# Altium PCB seven_segment_driver_pcb.PcbDoc
Units mm, origin at the board's own origin, x right, y up, seen from the top; angles counter-clockwise.
Board outline 151.89 x 101.22 mm, 2 copper layers (Top Layer, Bottom Layer); 93 components, 104 nets, 288 pads, 8 vias.
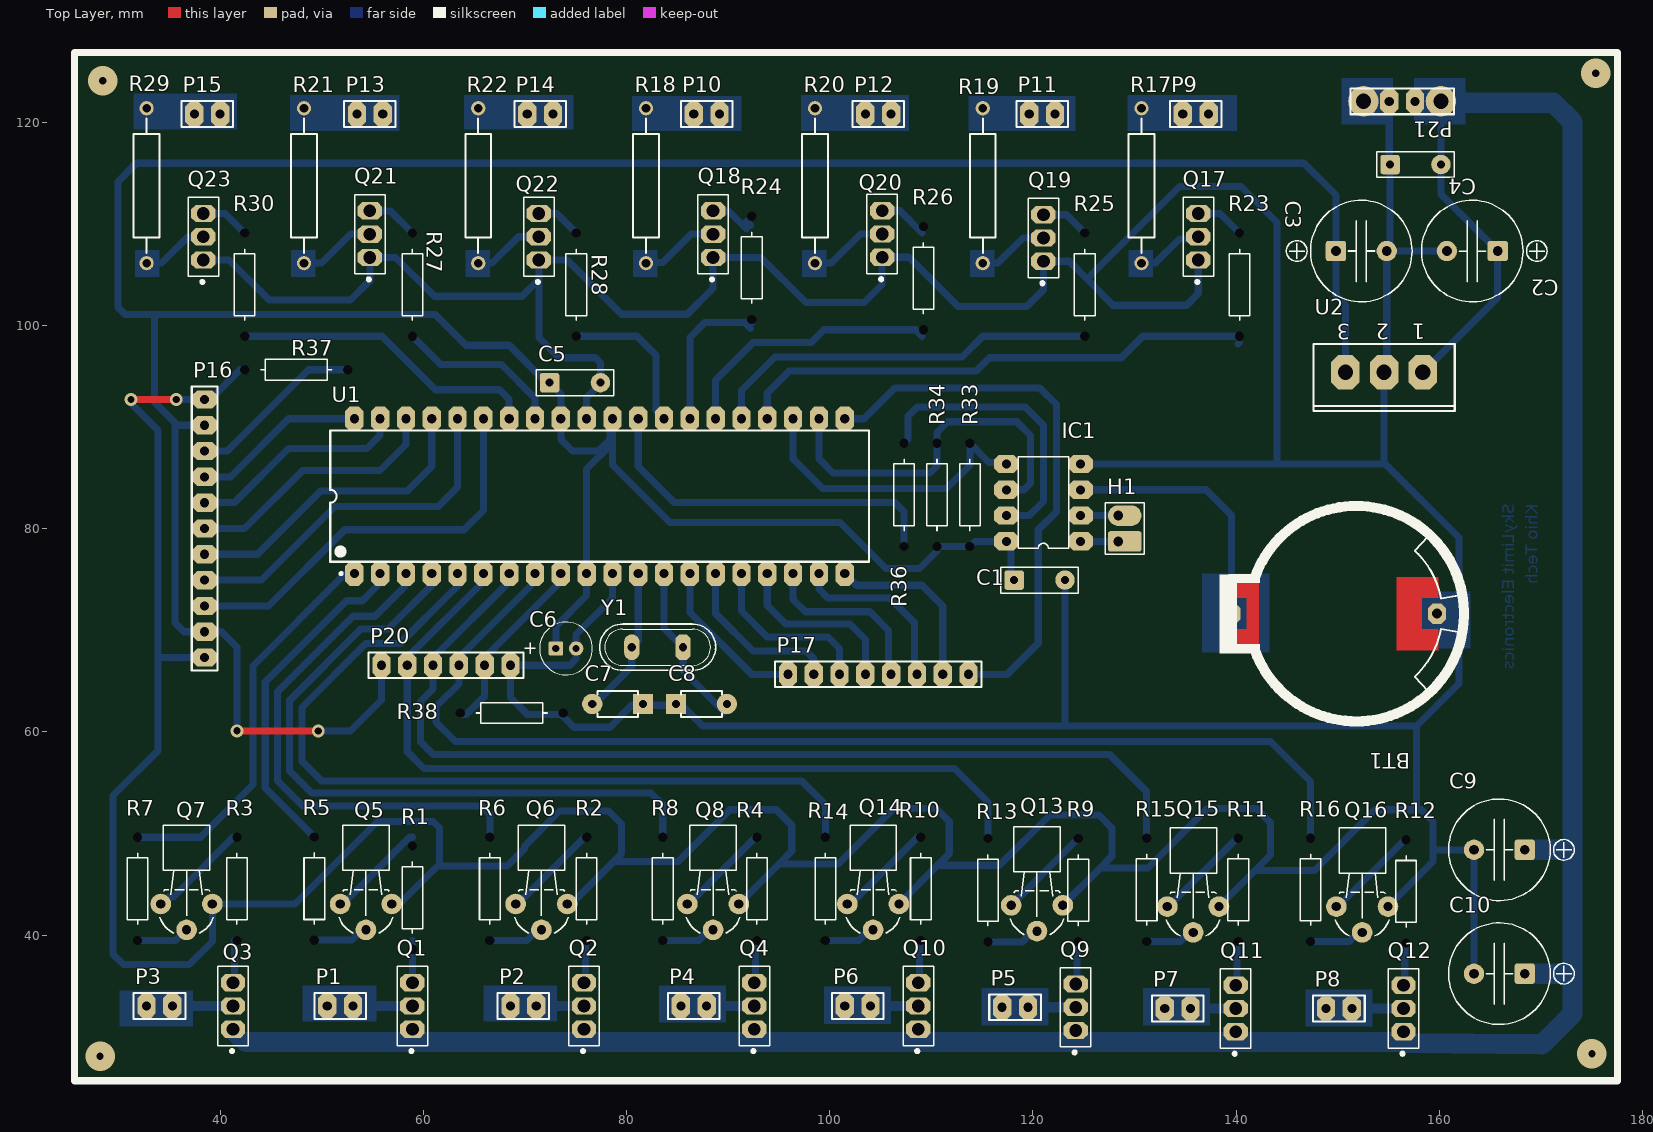
[diagram p0: Top Layer view]
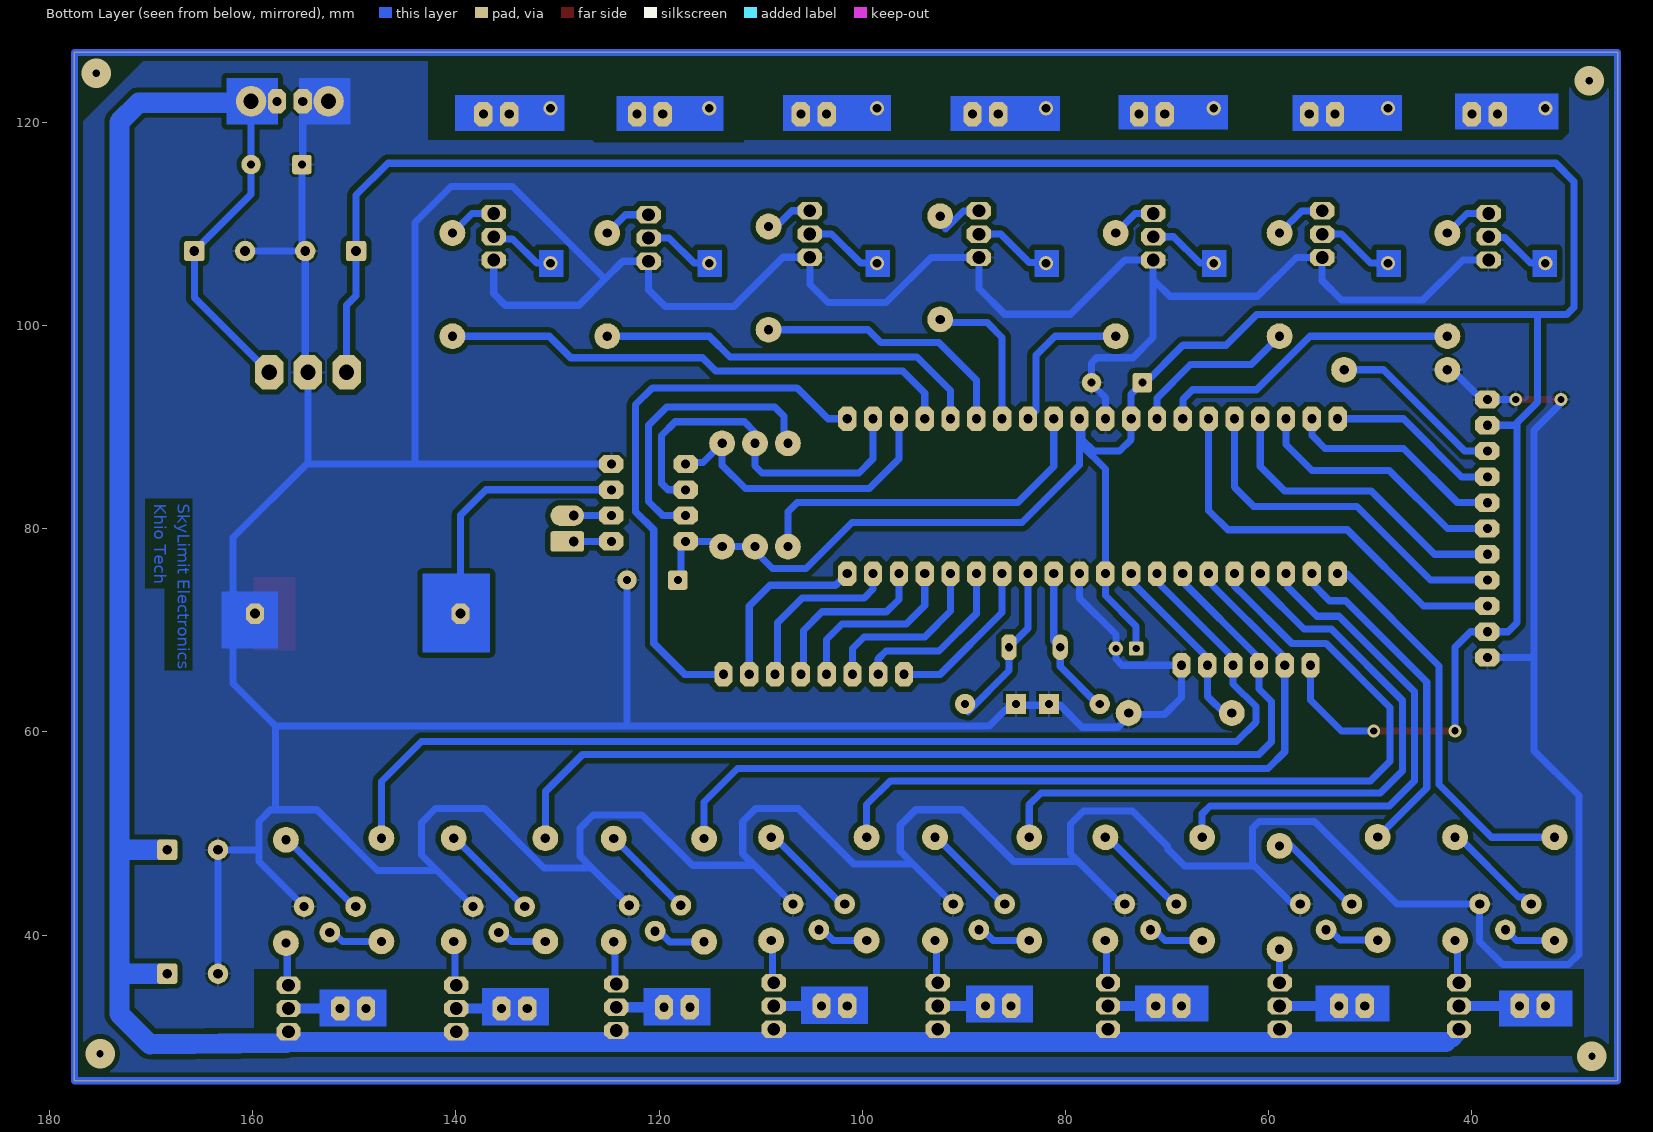
[diagram p1: Bottom Layer view, seen from below]
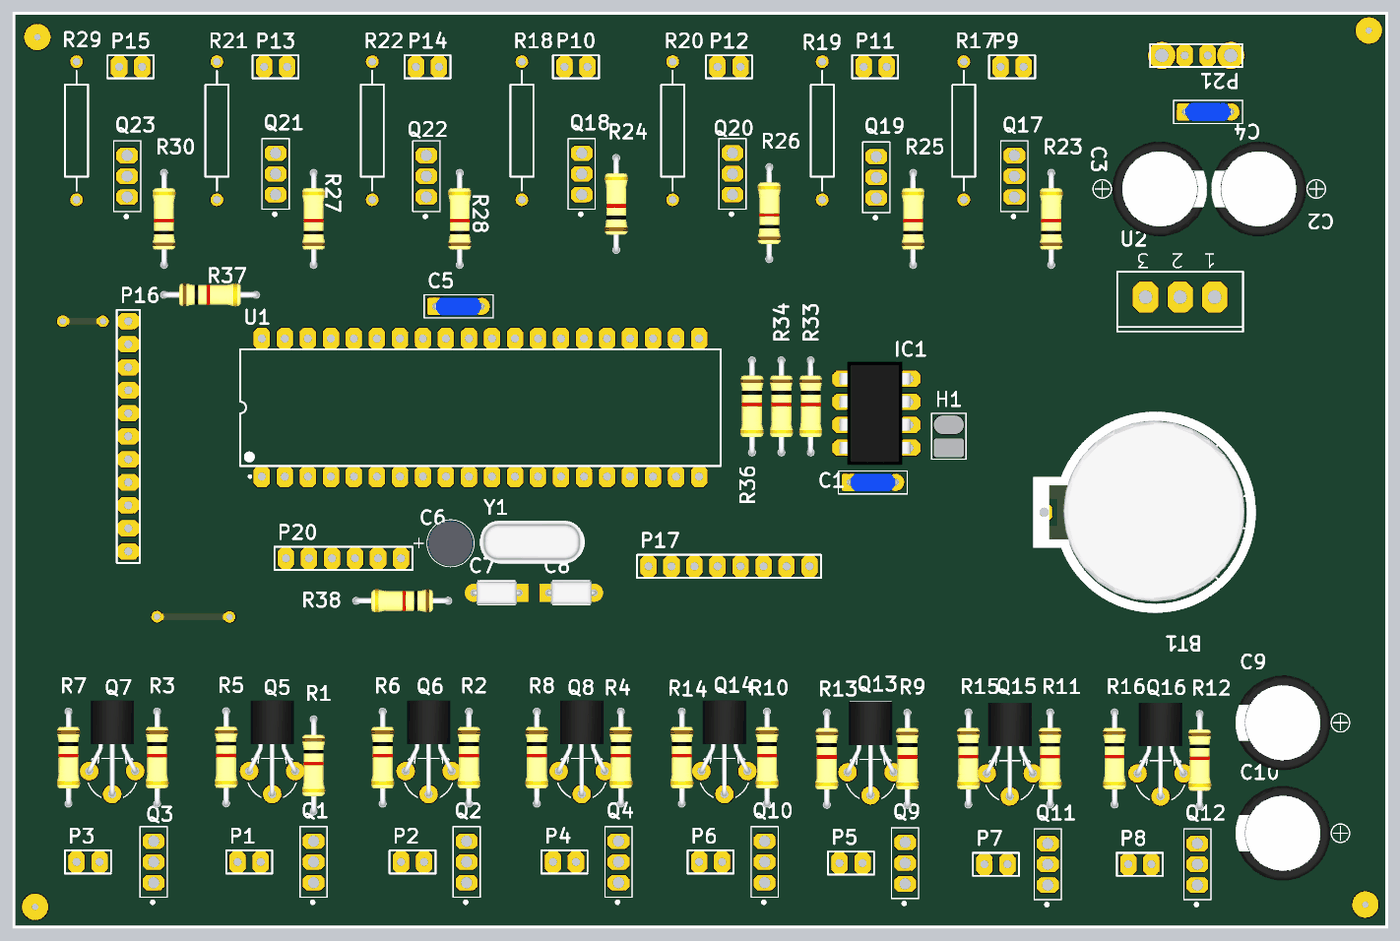
[diagram p2: 3D render of the assembled board from above, using the file's embedded part models]

## Layer stack, top to bottom
Top Solder: solder mask 0.0102, Solder Resist, Dk 3.5
Top Layer: signal copper 0.0356
Dielectric 1: dielectric 0.32, FR-4, Dk 4.8
Bottom Layer: signal copper 0.0356
Bottom Solder: solder mask 0.0102, Solder Resist, Dk 3.5

## Board outline
25.654,25.654 177.546,25.654 177.546,126.873 25.654,126.873

## Design rules (kind name [scope] priority, off if disabled: settings)
Clearance [All] p1: gap=0.5 ignorepadtopadclearanceinfootprint=FALSE except(0.8: Poly-Poly)
PolygonConnect [All] p1: connectstyle=Relief reliefconductorwidth=0.254 reliefentries=4 polygonreliefangle="90 Angle" airgapwidth=0.254
RoutingVias [All] p1: holewidth=0.711 width=1.27 viastyle="Through Hole" minholewidth=0.711 minwidth=1.27 maxholewidth=0.711 maxwidth=1.27
SolderMaskExpansion [All] p1: expansion=0.102
Width [All] p1: maxlimit=2 minlimit=0.7 preferedwidth=0.7
30 further rules are at their usual default settings.

## Classes and differential pairs
component class seven_segment_driver_sche: BT1 C1 C2 C3 C4 C5 C6 C7 C8 C9 C10 H1 IC1 P16 P17 P20 P21 Q24 Q25 R33 R34 R36 R37 R38 U1 U2 Y1
component class seven_segment_driver_sche2: P1 P2 P3 P4 P5 P6 P7 P8 P9 P10 P11 P12 P13 P14 P15 Q1 Q2 Q3 Q4 Q5 Q6 Q7 Q8 Q9 Q10 Q11 Q12 Q13 Q14 Q15 Q16 Q17 Q18 Q19 Q20 Q21 Q22 Q23 R1 R2 R3 R4 R5 R6 R7 R8 R9 R10 R11 R12 R13 R14 R15 R16 R17 R18 R19 R20 R21 R22 R23 R24 R25 R26 R27 R28 R29 R30

## Components (designator, comment, footprint, x,y, rotation, side; value= is the part's Value field where it differs from the comment)
BT1 "CR2032" "CR2032 CELL HOLDER" 151.816,71.628 r180 top
C1 "approved sub OK" CAPC500P450250X550 120.65,74.93 r0 top value=220n
C2 "470µ" CAPE10.0MM_Rad_10x14mm 163.235,107.315 r180 top
C3 "470µ" CAPE10.0MM_Rad_10x14mm 152.313,107.315 r0 top
C4 "approved sub OK" CAPC500P450250X550 157.647,115.824 r0 top value=220n
C5 "approved sub OK" CAPC500P450250X550 74.93,94.361 r0 top value=220n
C6 "approved sub OK" CAPE_5x11x2LS 74.041,68.199 r0 top value=10uF
C7 "K220J15C0GF5TH5" Vishay_K220J15_0 79.121,62.738 r180 top
C8 "K220J15C0GF5TH5" Vishay_K220J15_0 87.376,62.738 r0 top
C9 "470µ" CAPE10.0MM_Rad_10x14mm 165.902,48.387 r180 top
C10 "470µ" CAPE10.0MM_Rad_10x14mm 165.902,36.195 r180 top
H1 "Header" HDR_1x2_Offset 128.397,80.01 r180 top
IC1 "DS1307" DIP8-300 121.031,82.55 r180 top
P1 "Header 2" HDR1X2 50.546,33.024 r0 top
P2 "Header 2" HDR1X2 71.12,33.024 r180 top
P3 "Header 2" HDR1X2 35.306,33.024 r180 top
P4 "Header 2" HDR1X2 87.884,33.024 r180 top
P5 "Header 2" HDR1X2 119.507,32.897 r180 top
P6 "Header 2" HDR1X2 104.013,33.024 r180 top
P7 "Header 2" HDR1X2 135.509,32.77 r180 top
P8 "Header 2" HDR1X2 151.384,32.77 r180 top
P9 "Header 2" HDR1X2 137.287,120.796 r180 top
P10 "Header 2" HDR1X2 89.154,120.796 r180 top
P11 "Header 2" HDR1X2 122.174,120.796 r180 top
P12 "Header 2" HDR1X2 106.045,120.796 r180 top
P13 "Header 2" HDR1X2 53.467,120.796 r0 top
P14 "Header 2" HDR1X2 72.771,120.796 r180 top
P15 "Header 2" HDR1X2 40.005,120.796 r180 top
P16 "Header 11" HDR1X11 38.481,92.71 r270 top
P17 "Header 8" HDR1X8 95.885,65.659 r0 top
P20 "Header 6" HDR1X6 68.58,66.548 r180 top
P21 "Header 4" HDR1X4 152.527,122.047 r0 top
Q1 "BD136" *TO229P780X300X2000-3 58.928,30.734 r90 top
Q2 "BD136" *TO229P780X300X2000-3 75.819,30.734 r90 top
Q3 "BD136" *TO229P780X300X2000-3 41.275,30.734 r90 top
Q4 "BD136" *TO229P780X300X2000-3 92.583,30.734 r90 top
Q5 "2N3904" TO-92_Flat 54.356,43.053 r270 top
Q6 "2N3904" TO-92_Flat 71.628,43.053 r270 top
Q7 "2N3904" TO-92_Flat 36.703,43.053 r270 top
Q8 "2N3904" TO-92_Flat 88.519,43.053 r270 top
Q9 "BD136" *TO229P780X300X2000-3 124.206,30.607 r90 top
Q10 "BD136" *TO229P780X300X2000-3 108.712,30.734 r90 top
Q11 "BD136" *TO229P780X300X2000-3 139.954,30.48 r90 top
Q12 "BD136" *TO229P780X300X2000-3 156.464,30.48 r90 top
Q13 "2N3904" TO-92_Flat 120.396,42.926 r270 top
Q14 "2N3904" TO-92_Flat 104.267,43.053 r270 top
Q15 "2N3904" TO-92_Flat 135.763,42.799 r270 top
Q16 "2N3904" TO-92_Flat 152.4,42.799 r270 top
Q17 "BD135" *TO229P780X300X2000-3 136.271,106.433 r90 top
Q18 "BD135" *TO229P780X300X2000-3 88.519,106.687 r90 top
Q19 "BD135" *TO229P780X300X2000-3 121.031,106.306 r90 top
Q20 "BD135" *TO229P780X300X2000-3 105.156,106.699 r90 top
Q21 "BD135" *TO229P780X300X2000-3 54.737,106.687 r90 top
Q22 "BD135" *TO229P780X300X2000-3 71.374,106.433 r90 top
Q23 "BD135" *TO229P780X300X2000-3 38.354,106.433 r90 top
R1 "Carbon Film" RESTH_AXIAL-0.4 58.928,43.688 r270 top value=1K
R2 "Carbon Film" RESTH_AXIAL-0.4 76.073,44.54 r270 top value=1K
R3 "Carbon Film" RESTH_AXIAL-0.4 41.656,44.54 r270 top value=1K
R4 "Carbon Film" RESTH_AXIAL-0.4 92.837,44.54 r270 top value=1K
R5 "Carbon Film" RESTH_AXIAL-0.4 49.276,44.577 r270 top value=1K
R6 "Carbon Film" RESTH_AXIAL-0.4 66.548,44.54 r270 top value=1K
R7 "Carbon Film" RESTH_AXIAL-0.4 31.877,44.54 r270 top value=1K
R8 "Carbon Film" RESTH_AXIAL-0.4 83.566,44.54 r270 top value=1K
R9 "Carbon Film" RESTH_AXIAL-0.4 124.46,44.413 r270 top value=1K
R10 "Carbon Film" RESTH_AXIAL-0.4 108.966,44.54 r270 top value=1K
R11 "Carbon Film" RESTH_AXIAL-0.4 140.208,44.45 r270 top value=1K
R12 "Carbon Film" RESTH_AXIAL-0.4 156.718,44.286 r270 top value=1K
R13 "Carbon Film" RESTH_AXIAL-0.4 115.57,44.413 r270 top value=1K
R14 "Carbon Film" RESTH_AXIAL-0.4 99.568,44.54 r270 top value=1K
R15 "Carbon Film" RESTH_AXIAL-0.4 131.191,44.45 r270 top value=1K
R16 "Carbon Film" RESTH_AXIAL-0.4 147.32,44.45 r270 top value=1K
R17 "Metal Film" AXIAL-0.6 130.683,113.744 r270 top value=10R
R18 "Metal Film" AXIAL-0.6 81.915,113.744 r270 top value=10R
R19 "Metal Film" AXIAL-0.6 115.062,113.744 r270 top value=10R
R20 "Metal Film" AXIAL-0.6 98.552,113.744 r270 top value=10R
R21 "Metal Film" AXIAL-0.6 48.26,113.744 r270 top value=10R
R22 "Metal Film" AXIAL-0.6 65.405,113.744 r270 top value=10R
R23 "Carbon Film" RESTH_AXIAL-0.4 140.335,104.013 r90 top value=1K
R24 "Carbon Film" RESTH_AXIAL-0.4 92.329,105.664 r90 top value=1K
R25 "Carbon Film" RESTH_AXIAL-0.4 125.095,104.013 r90 top value=1K
R26 "Carbon Film" RESTH_AXIAL-0.4 109.22,104.648 r90 top value=1K
R27 "Carbon Film" RESTH_AXIAL-0.4 58.928,104.013 r90 top value=1K
R28 "Carbon Film" RESTH_AXIAL-0.4 75.057,104.013 r90 top value=1K
R29 "Metal Film" AXIAL-0.6 32.766,113.744 r270 top value=10R
R30 "Carbon Film" RESTH_AXIAL-0.4 42.418,104.013 r90 top value=1K
R33 "Carbon Film" RESTH_AXIAL-0.4 113.792,83.312 r270 top value=4.7K
R34 "Carbon Film" RESTH_AXIAL-0.4 110.553,83.312 r270 top value=4.7K
R36 "Carbon Film" RESTH_AXIAL-0.4 107.315,83.312 r270 top value=330
R37 "Carbon Film" RESTH_AXIAL-0.4 47.498,95.631 r0 top value=2.2K
R38 "Carbon Film" RESTH_AXIAL-0.4 68.707,61.849 r180 top value=10K
U1 "ATmega32-16PU" 40P6 77.343,83.185 r90 top
U2 "LM7805" To-254-AA 154.559,95.377 r180 top
Y1 "4MHz" "Cristal mini" 83.058,68.326 r180 top

## Footprints (in the part's own frame and the unit in brackets; to place one, negate y for a bottom-side part, rotate by r counter-clockwise, add the part's x,y. Pads: shape width x height; smd on the part's side, far side on the other; paste and mask are expansions set on the pad)
40P6 [mm] "40-Pin Ceramic Dual In-Line Package (CerDIP)"
  oct 2.4x1.8 hole 0.9: 1(-7.62,24.13) 2(-7.62,21.59) 3(-7.62,19.05) 4(-7.62,16.51) 5(-7.62,13.97) 6(-7.62,11.43) 7(-7.62,8.89) 8(-7.62,6.35) 9(-7.62,3.81) 10(-7.62,1.27) 11(-7.62,-1.27) 12(-7.62,-3.81) 13(-7.62,-6.35) 14(-7.62,-8.89) 15(-7.62,-11.43) 16(-7.62,-13.97) 17(-7.62,-16.51) 18(-7.62,-19.05) 19(-7.62,-21.59) 20(-7.62,-24.13) 21(7.62,-24.13) 22(7.62,-21.59) 23(7.62,-19.05) 24(7.62,-16.51) 25(7.62,-13.97) 26(7.62,-11.43) 27(7.62,-8.89) 28(7.62,-6.35) 29(7.62,-3.81) 30(7.62,-1.27) 31(7.62,1.27) 32(7.62,3.81) 33(7.62,6.35) 34(7.62,8.89) 35(7.62,11.43) 36(7.62,13.97) 37(7.62,16.51) 38(7.62,19.05) 39(7.62,21.59) 40(7.62,24.13)
  silkscreen extent -7.74,-26.5 6.45,26.5, body extent -7.05,-26.47 7.05,26.47, height 4.83
*TO229P780X300X2000-3 [mm]
  oct 1.7x2.4 hole 1.25: 1(0,0) 2(2.29,0) 3(4.58,0)
  silkscreen extent -2.31,-1.5 6.19,1.5
AXIAL-0.6 [mm] "Axial Device, Thru-Hole; 2 Leads; 0.6 in Pin Spacing"
  round 1.4 hole 0.85: 1(-7.62,0) 2(7.62,0)
  silkscreen extent -6.6,-1.27 6.6,1.27
CAPC500P450250X550 [mm] "TDK FK24 radial ceramic capacitor"
  round 0.508 on Mech15: 0(0,0)
  rrect25% 1.905x1.905 hole 0.8: 1(-2.5,0)
  round 1.905 hole 0.8: 2(2.5,0)
  silkscreen extent -3.81,-1.27 3.81,1.27, body extent -2.8,-1 2.8,1, height 5.47
CAPE10.0MM_Rad_10x14mm [mm] "10mm Pitch Radial Capacitor 10x14mm DxH"
  round 0.5 on Mech15: 0(0,0)
  rrect25% 2x2 hole 0.965: 1(-2.5,0)
  round 2 hole 0.965: 2(2.5,0)
  silkscreen extent -7.37,-5 5,5, body extent -5.25,-5.24 5.21,5.24, height 13.99
CAPE_5x11x2LS [mil] "Capacitor, electrolytic, radial can"
  round 39.37 on Mech15: 0(0,0)
  rrect25% 56x56 hole 28: 1(-39.37,0)
  round 56 hole 28: 2(39.37,0)
  silkscreen extent -159,-102 102,102, body extent -98,-98 98,98, height 433
"CR2032 CELL HOLDER" [mm]
  oct 1.8x2 hole 1: 1(12.275,0) 2(-7.95,0)
  Top Layer region: 10.802,3.591 9.577,3.591 9.577,-3.61 10.802,-3.61
  Top Layer region: 9.577,-1.534 9.577,-3.609 12.302,-3.609 12.302,-1.534
  Top Layer region: 12.298,1.534 12.298,3.609 9.573,3.609 9.573,1.534
  Top Layer region: -8.109,-1.527 -8.109,-3.602 -3.959,-3.602 -3.959,-1.527
  Top Layer region: -3.94,1.527 -3.94,3.602 -8.09,3.602 -8.09,1.527
  Top Layer region: -6.475,-3.6 -3.95,-3.6 -3.95,3.6 -6.475,3.6
  silkscreen extent -10.6,-10.6 13.47,10.6, body extent -10.62,-10.59 13.17,10.63, height 10
"Cristal mini" [mm] "Cristal de cuarzo empaque pequeño"
  oct 1.524x2.54 hole 0.8: 1(-2.5,0)
  oval 1.524x2.54 hole 0.8: 2(2.54,0)
  silkscreen extent -5.71,-2.29 5.71,2.29, body extent -5.63,-2.35 5.72,2.3, height 3.5
DIP8-300 [mm] "DIP, 8-Leads, 0.300\" lead span , 0.100\" lead pitch, IPC Density A"
  round 1 on Mech15: 0(0,0)
  oct 2.4x1.8 hole 0.889: 1(-3.658,3.81) 2(-3.658,1.27) 3(-3.658,-1.27) 4(-3.658,-3.81) 5(3.658,-3.81) 6(3.658,-1.27) 7(3.658,1.27) 8(3.658,3.81)
  silkscreen extent -2.5,-4.5 2.5,4.5, body extent -3.78,-5.71 4.09,5.72, height 4.19
HDR1X2 [mm] "Connector; Header; 2 Position"
  oct 1.8x2.4 hole 0.9: 1(0,0) 2(2.54,0)
  silkscreen extent -1.27,-1.27 3.81,1.27
HDR1X4 [mm] "Connector; Header; 4 Position"
  round 3 hole 1.5: 1(0,0) 4(7.62,0)
  oct 1.8x2.4 hole 0.9: 2(2.54,0) 3(5.08,0)
  silkscreen extent -1.27,-1.27 8.89,1.27
HDR1X6 [mm] "Connector; Header; 6 Position"
  oct 1.8x2.4 hole 0.9: 1(0,0) 2(2.54,0) 3(5.08,0) 4(7.62,0) 5(10.16,0) 6(12.7,0)
  silkscreen extent -1.27,-1.27 13.97,1.27
HDR1X8 [mm] "Connector; Header; 8 Position"
  oct 1.8x2.4 hole 0.9: 1(0,0) 2(2.54,0) 3(5.08,0) 4(7.62,0) 5(10.16,0) 6(12.7,0) 7(15.24,0) 8(17.78,0)
  silkscreen extent -1.27,-1.27 19.05,1.27
HDR1X11 [mm] "Connector; Header; 11 Position"
  oct 1.8x2.4 hole 0.9: 1(0,0) 2(2.54,0) 3(5.08,0) 4(7.62,0) 5(10.16,0) 6(12.7,0) 7(15.24,0) 8(17.78,0) 9(20.32,0) 10(22.86,0) 11(25.4,0)
  silkscreen extent -1.27,-1.27 26.67,1.27
HDR_1x2_Offset [mil]
  rrect25% 130x80 smd far side: 1(-25,50)
  rrect25% 130x80 smd: 1(-25,50)
  rrect25% 60x60 hole 38: 1(0,50)
  oval 130x80 smd far side: 2(-25,-50)
  oval 130x80 smd: 2(-25,-50)
  round 60 hole 38: 2(0,-50)
  silkscreen extent -100,-100 50,100
RESTH_AXIAL-0.4 [mil]
  round 0 / inner round 0 / far side round 100 hole 36 unplated: 1(-200,0) 2(200,0)
  silkscreen extent -138,-40 138,40, body extent -212,-50 212,50, height 102
TO-92_Flat [mil]
  round 80 hole 36: 1(0,100) 2(100,0) 3(0,-100)
  silkscreen extent -305,-104 114,104, body extent -307,-110 110,110, height 142
To-254-AA [mm] "TO, Thru-Hole, Vertical, Heatsink Mounted; 3 In-Line Leads; Pitch 3.81 mm"
  oct 2.8x3.4 hole 1.5: 1(-3.81,0) 2(0,0) 3(3.81,0)
  silkscreen extent -6.95,-2.8 6.95,3.8
Vishay_K220J15_0 [mm]
  rect 2x2 hole 0.8 paste-1000 mask+0: 1(-2.5,0)
  round 2 hole 0.8 paste-1000 mask+0: 2(2.5,0)
  silkscreen extent -2,-1.3 2,1.3, body extent -3.2,-1.4 3.2,1.4, height 0.25

## Part data
BT1: library part "CR2032 Cell Holder", "CR2032 Cell Holder", LatestRevisionDate=17-Jul-2002, LatestRevisionNote="Re-released for DXP Platform.", Published=06-May-2014, Publisher="Cynetik Group", Revised="Zion Blue"
C1 C4 C5 C6: library part CAPR_220n_Radial_5mm, "Capacitor Ceramic 220nF 10% 50V X7R radial 5mm lead spacing", Manufacturer 1="TDK Corporation", Manufacturer Part Number 1=FK24X7R1H224K, Operating Temperature="-55°C ~ 125°C", Package / Case="0.217\" L x 0.177\" W (5.50mm x 4.50mm) radial 5mm LS", Ratings="50V; X7R", Supplier Part Number 1=445-2855-ND, Tolerance=±10%, ComponentLink1Description="e4941_fk datasheet", ComponentLink1URL=http://www.tdk.co.jp/tefe02/e4941_fk.pdf, Material=ceramic, SCDType=spec, Supplier 1=Digi-Key
C2 C3 C9 C10: library part CAPE_470u_16V_THT, "Capacitor THT Alum Elec 470uF 20% 16V", Manufacturer 1=NICHICON, Manufacturer 2=JD, Manufacturer Part Number 1=UHM1C471MPD6, Manufacturer Part Number 2=GT470UF16V_10x12mm, Package / Case=Radial, Ratings="16V; 105°C", Supplier Part Number 1=54K8151, Tolerance=±20%, Material="Al Electrolytic", SCDType=undef, Supplier 1=Newark
H1: library part Header2P, "Header, 2-pin"
IC1: "Ic Rtc Clk/Calendar I2c 8-Dip", Package="DIP-8 Maxim Integrated", Availability=Unavailable, MF="Maxim Integrated", MP=DS1307, Price=None, SnapEDA_Link=https://www.snapeda.com/parts/DS1307/Maxim%20Integrated/view-part/?ref=snap
P1 P2 P3 P4 P5 P6 P7 P8 P9 P10 P11 P12 P13 P14 P15: "Header, 2-Pin", LatestRevisionDate=17-Jul-2002, LatestRevisionNote="Re-released for DXP Platform.", Publisher="Altium Limited"
P16: "Header, 11-Pin", LatestRevisionDate=17-Jul-2002, LatestRevisionNote="Re-released for DXP Platform.", Publisher="Altium Limited"
P17: "Header, 8-Pin", LatestRevisionDate=17-Jul-2002, LatestRevisionNote="Re-released for DXP Platform.", Publisher="Altium Limited"
P20: "Header, 6-Pin", LatestRevisionDate=17-Jul-2002, LatestRevisionNote="Re-released for DXP Platform.", Publisher="Altium Limited"
P21: "Header, 4-Pin", LatestRevisionDate=17-Jul-2002, LatestRevisionNote="Re-released for DXP Platform.", Publisher="Altium Limited"
Q5 Q6 Q7 Q8 Q13 Q14 Q15 Q16: "NPN General Purpose Amplifier", ComponentLink1Description="Manufacturer Link", ComponentLink1URL=http://www.fairchildsemi.com/, ComponentLink2Description=Datasheet, ComponentLink2URL=http://www.fairchildsemi.com/ds/2N%2F2N3904.pdf, DatasheetVersion=1997, LatestRevisionDate=15-Jan-2003, LatestRevisionNote="PCB Footprint 'BCY-W3/D4.7' replaced", PackageDescription="TO, Flat Index; 3 In-Line, Axial Leads; Body Dia. 4.5mm; Leads 0.51 x 0.48 mm (max)", PackageReference=TO-92A, PackageVersion=Sep-1998, Published=8-Jun-2000, Publisher="Altium Limited"
Q17 Q18 Q19 Q20 Q21 Q22 Q23: "Trans GP BJT NPN 45V 1.5A 3-Pin TO-126", Package="TO-126-3 NXP Semiconductors", Availability=Unavailable, MF="ON Semiconductor", MP=BD135, Price=None, SnapEDA_Link=https://www.snapeda.com/parts/BD135/ON%20Semiconductor/view-part/?ref=snap
R1 R2 R3 R4 R5 R6 R7 R8 R9 R10 R11 R12 R13 R14 R15 R16 R23 R24 R25 R26 R27 R28 R30 R33 R34 R36 R37 R38: library part RES_1K_Axial_0.25W_5%, "Resistor THD Axial 1k Ohm 0.25W 5% Carbon Film", Manufacturer 1=Yageo, Manufacturer Part Number 1=CFR-25JB-1K0, Package / Case=Axial, Ratings=1/4W, Supplier Part Number 1=1.0KQBK-ND, Tolerance=±5%, SCDType=spec, Supplier 1=Digi-Key
R17 R18 R19 R20 R21 R22 R29: library part RES_10R_Axial_1W_5%, "Resistor THD 10 Ohm 1W 5% Metal Film", Manufacturer 1="Vishay/BC Components", Manufacturer Part Number 1=PR01000101009JR500, Package / Case="2.5x8.0mm DxL", Ratings=1W, Supplier Part Number 1=PPC10W-1CT-ND, Tolerance=±5%, SCDType=spec, Supplier 1=Digi-Key
U1: "8-bit AVR Microcontroller, 4.5-5.5V, 16MHz, 32KB Flash, 1024 Bytes EEPROM, 2KB SRAM, 40-pin PDIP, Industrial Grade (-40°C to 85°C)", Code_JEDEC=MS-011-AC, ComponentLink1Description="Manufacturer URL", ComponentLink1URL=http://www.atmel.com/, ComponentLink2Description="ATmega32(L) Datasheet", ComponentLink2URL=http://atmel.com/dyn/resources/prod_documents/doc2503.pdf, ComponentLink3Description="ATmega32(L) Summary", ComponentLink3URL=http://atmel.com/dyn/resources/prod_documents/2503S.pdf, DatasheetVersion="revQ, Feb-2011", PackageDescription="40-lead (0.600\"/15.24mm Wide) Plastic Dual Inline Package (PDIP)", PackageReference=40P6, PackageVersion="revB, Sep-2001"
U2: "IC REG LIN 5V 1A"
Y1: library part "Quartz Crystal", "Quartz Crystal", Created By="Zion Blue", Nominal Fequency=4MHz, Published="8 April 2014", Publisher="Cynetik Group"

## Via types
v1: diameter 2.9, hole 0.711, Top Layer to Bottom Layer, 4 vias
v2: diameter 1.27, hole 0.711, Top Layer to Bottom Layer, 4 vias

## Nets (pads, with @x,y where several pads share a name; then routed paths per layer and width w, separated by ;. In a path a pad name is that pad's centre, name@x,y a point inside that pad or via, vN(x,y) a via of type N, cw(c..) or ccw(c..) an arc to the next point about the centre after c; other vN are vias at no path point)
+5V: C1.1 C3.1 C5.1 C6.1 IC1.8 P16.2 P16.10 P20.6 R33.2 R34.2 U1.10 U1.30 U1.32 U2.3 | length 355.6
  Top Layer w0.7: v2(41.656,60.096) 41.668,60.083 49.645,60.083 v2(49.657,60.071)
  Bottom Layer w0.7: P16.2 35.56,90.17 ; v2(41.656,60.096) 41.656,68.326 40.132,69.85 P16.10 36.449,69.85 35.56,70.739 35.56,90.17 ; v2(49.657,60.071) 52.832,60.071 55.88,63.119 P20.6 ; C6.1 73.041,70.374 76.073,73.406 U1.10 76.073,85.852 78.613,88.392 ; C1.1 117.856,75.224 117.856,78.257 IC1.8 114.3,78.74 R33.2 R34.2 110.553,77.787 108.839,76.073 105.537,76.073 101.022,80.588 84.269,80.588 78.613,86.244 78.613,88.392 ; U2.3 150.749,101.981 149.813,102.917 C3.1 149.813,112.823 146.685,115.951 31.75,115.951 29.972,114.173 29.972,101.766 30.685,101.053 33.528,101.053 ; 33.528,101.053 33.528,92.456 35.56,90.424 35.56,90.17 ; 33.528,101.053 61.207,101.053 64.216,98.044 68.453,98.044 72.136,94.361 C5.1 73.533,93.258 U1.32 73.533,88.773 74.676,87.63 77.216,87.63 78.359,88.773 78.359,90.805 U1.30 78.613,88.392
+12V: C2.1 C4.2 C9.1 C10.1 P21.3 P21.4 Q1.1 Q2.1 Q3.1 Q4.1 Q9.1 Q10.1 Q11.1 Q12.1 U2.1 | length 283.5
  Bottom Layer w0.7: P21.3 158.242,122.047 P21.4 160.147,121.92 C4.2 160.147,112.903 C2.1 165.735,102.743 U2.1 ; 172.847,48.387 173.101,48.133 ; 172.974,36.195 173.101,36.068
  Bottom Layer w1: Q3.1 41.021,30.48 41.021,30.226 41.783,29.464 42.545,29.464 ; 156.337,29.591 156.456,29.59 ; P21.3 157.607,122.682 158.242,122.047 P21.3@158.369,121.92
  Bottom Layer w2: 42.545,29.464 75.819,29.464 108.712,29.464 124.206,29.464 156.21,29.464 156.337,29.591 ; 156.456,29.59 156.663,29.379 170.1,29.257 173.101,32.258 173.101,36.068 173.101,48.133 173.101,120.015 171.196,121.92 160.147,121.92 P21.3@158.369,121.92 ; C10.1 172.974,36.195 ; C9.1 172.847,48.387
GND: BT1.2 C1.2 C2.2 C3.2 C4.1 C5.2 C6.2 C7.1 C8.1 C9.2 C10.2 IC1.4 P16.1 P16.11 P20.1 P21.1 P21.2 Q5.1 Q6.1 Q7.1 Q8.1 Q13.1 Q14.1 Q15.1 Q16.1 Q17.1 Q18.1 Q19.1 Q20.1 Q21.1 Q22.1 Q23.1 R37.1 R38.1 U1.11 U1.31 U2.2 | length 760.1
  Top Layer w0.7: v2(31.242,92.71) v2(35.687,92.71)
  Bottom Layer w0.7: v2(31.242,92.71) 31.242,92.329 33.909,89.662 33.909,67.31 ; v2(35.687,92.71) P16.1 39.026,92.71 41.947,95.631 R37.1 ; Q23.1 40.887,106.433 44.831,102.489 52.832,102.489 54.737,104.394 Q21.1 57.27,106.687 61.087,102.87 69.723,102.87 71.374,104.521 ; P16.11 33.909,67.31 ; Q5.1 57.658,43.053 61.404,46.799 ; Q6.1 74.202,43.087 74.583,43.087 78.74,47.244 ; U1.31 76.073,92.886 77.43,94.243 C5.2 77.43,96.306 76.923,96.813 73.367,96.813 71.374,98.806 71.374,104.521 ; U1.11 78.613,73.152 75.041,69.58 C6.2 75.041,67.167 74.422,66.548 P20.1 68.58,63.373 70.231,61.722 73.567,61.722 74.837,60.452 78.359,60.452 80.518,62.611 84.876,62.611 85.471,62.611 87.503,60.579 123.15,60.579 ; Q8.1 94.996,46.99 ; Q14.1 110.617,46.863 ; Q13.1 126.619,46.609 ; C1.2 123.15,60.579 ; IC1.4 144.145,86.36 ; Q17.1 136.271,103.124 135.128,101.981 127.889,101.981 125.319,104.551 ; Q15.1 141.859,46.355 ; P21.1 P21.2 155.067,115.904 C4.1 155.147,107.649 C3.2 ; Q16.1 159.385,47.244 159.385,48.514 ; C2.2 C3.2 ; C10.2 C9.2 159.512,48.387 159.385,48.514 ; 33.909,67.31 33.909,58.166 29.464,53.721 29.464,38.1 30.48,37.084 36.957,37.084 39.243,39.37 Q7.1 47.371,43.053 55.499,51.181 60.96,51.181 61.595,50.546 61.595,46.99 61.404,46.799 ; 61.404,46.799 68.263,46.799 69.977,48.514 69.977,48.768 73.406,52.197 78.232,52.197 79.502,50.927 79.502,48.006 78.74,47.244 ; 71.374,104.521 Q22.1 74.161,106.433 79.502,101.092 85.979,101.092 88.519,103.632 Q18.1 93.211,106.687 97.663,102.235 103.378,102.235 105.156,104.013 Q20.1 107.804,106.699 112.649,101.854 119.38,101.854 121.031,103.505 Q19.1 123.564,106.306 125.319,104.551 ; 78.74,47.244 85.09,47.244 90.17,52.324 94.742,52.324 96.266,50.8 96.266,48.26 94.996,46.99 ; 94.996,46.99 100.838,46.99 106.299,52.451 110.49,52.451 111.76,51.181 111.76,48.006 110.617,46.863 ; 110.617,46.863 116.713,46.863 121.666,51.816 126.492,51.816 127.762,50.546 127.762,47.752 126.619,46.609 ; 123.15,60.579 157.734,60.579 ; 125.319,104.551 134.434,113.665 140.462,113.665 144.018,110.109 144.018,86.487 144.145,86.36 ; 126.619,46.609 131.318,46.609 137.16,52.451 141.986,52.451 143.383,51.054 143.383,47.879 141.859,46.355 ; 141.859,46.355 147.701,46.355 153.67,52.324 157.734,52.324 ; 144.145,86.36 154.432,86.36 154.559,86.487 ; 154.559,86.487 U2.2 154.813,95.631 C3.2 ; 154.559,86.487 161.925,79.121 161.925,73.787 BT1.2 161.925,69.469 161.925,64.77 157.734,60.579 ; 157.734,52.324 157.734,60.579 ; 157.734,52.324 158.242,52.324 159.385,51.181 159.385,48.514
KP1: P17.1 U1.14 | length 16
  Bottom Layer w0.7: U1.14 86.233,71.755 92.329,65.659 P17.1
KP2: P17.2 U1.15 | length 17
  Bottom Layer w0.7: U1.15 88.773,71.614 92.442,67.945 97.663,67.945 98.425,67.183 P17.2
KP3: P17.3 U1.16 | length 17.4
  Bottom Layer w0.7: U1.16 91.313,71.882 93.853,69.342 99.822,69.342 100.965,68.199 P17.3
KP4: P17.4 U1.17 | length 17.6
  Bottom Layer w0.7: U1.17 93.853,72.422 95.663,70.612 101.981,70.612 103.505,69.088 P17.4
KP5: P17.5 U1.18 | length 17.8
  Bottom Layer w0.7: U1.18 96.393,73.025 97.601,71.817 103.951,71.817 105.791,69.977 105.791,65.659 P17.5
KP6: P17.6 U1.19 | length 17.6
  Bottom Layer w0.7: U1.19 98.933,74.041 99.822,73.152 105.918,73.152 108.331,70.739 108.331,65.659 P17.6
KP7: P17.7 U1.20 | length 17.7
  Bottom Layer w0.7: U1.20 102.616,74.422 109.093,74.422 111.125,72.39 P17.7
KP8: P17.8 U1.21 | length 55.1
  Bottom Layer w0.7: U1.21 103.378,90.805 106.426,93.853 120.65,93.853 122.301,92.202 122.301,81.661 120.523,79.883 120.523,68.707 117.475,65.659 P17.8
lcdD4: P16.6 U1.38 | length 25.8
  Bottom Layer w0.7: P16.6 42.418,80.01 48.133,85.725 55.753,85.725 58.293,88.265 U1.38
lcdD5: P16.7 U1.37 | length 30.6
  Bottom Layer w0.7: P16.7 43.688,77.47 49.911,83.693 58.42,83.693 60.833,86.106 U1.37
lcdD6: P16.8 U1.36 | length 35.4
  Bottom Layer w0.7: P16.8 44.069,74.93 51.308,82.169 61.468,82.169 63.373,84.074 U1.36
lcdD7: P16.9 U1.35 | length 40.3
  Bottom Layer w0.7: P16.9 44.774,72.39 52.267,79.883 64.008,79.883 65.913,81.788 U1.35
lcdE: P16.5 U1.39 | length 21.6
  Bottom Layer w0.7: P16.5 41.402,82.55 46.736,87.884 54.456,87.884 55.753,89.181 U1.39
lcdRS: P16.4 U1.40 | length 17.1
  Bottom Layer w0.7: P16.4 41.021,85.09 46.736,90.805 U1.40
Miso: P20.4 R15.1 U1.7 | length 98.2
  Bottom Layer w0.7: U1.7 68.453,74.763 60.96,67.27 P20.4 60.96,64.212 59.726,62.978 59.726,59.019 60.96,57.785 127.508,57.785 131.191,54.102 R15.1
Mosi: P20.5 R13.1 U1.6 | length 83.4
  Bottom Layer w0.7: U1.6 65.913,74.803 58.42,67.31 P20.5 58.42,58.039 60.084,56.375 112.281,56.375 115.57,53.086 R13.1
NetBT1_1: BT1.1 IC1.3 | length 25.6
  Bottom Layer w0.7: IC1.3 137.033,83.82 139.541,81.312 BT1.1
NetC7_2: C7.2 U1.12 Y1.2 | length 14.9
  Bottom Layer w0.7: C7.2@76.621,62.524 80.518,66.421 Y1.2 81.153,68.961 U1.12
NetC8_2: C8.2 U1.13 Y1.1 | length 16
  Bottom Layer w0.7: U1.13 83.693,70.191 Y1.1 85.558,66.023 C8.2@89.605,61.976
NetH1_1: H1.1 IC1.1 | length 3.7
  Bottom Layer w0.7: IC1.1 H1.1@128.397,78.74
NetH1_2: H1.2 IC1.2 | length 3.7
  Bottom Layer w0.7: IC1.2 H1.2@128.397,81.28
NetIC1_7: IC1.7 R36.1 | length 29
  Bottom Layer w0.7: R36.1 107.696,88.773 107.696,91.059 108.585,91.948 119.253,91.948 121.031,90.17 121.031,82.677 119.634,81.28 IC1.7
NetP1_1: P1.1 P1.2 Q1.2 | length 8.4
  Bottom Layer w0.7: P1.1 P1.2
  Bottom Layer w1: P1.2 Q1.2
NetP2_1: P2.1 P2.2 Q2.2 | length 7.2
  Bottom Layer w0.7: P2.2 P2.1
  Bottom Layer w1: P2.1 Q2.2
NetP3_1: P3.1 P3.2 Q3.2 | length 8.5
  Bottom Layer w0.7: P3.2 P3.1
  Bottom Layer w1: P3.1 Q3.2
NetP4_1: P4.1 P4.2 Q4.2 | length 7.2
  Bottom Layer w0.7: P4.2 P4.1
  Bottom Layer w1: P4.1 Q4.2
NetP5_1: P5.1 P5.2 Q9.2 | length 7.2
  Bottom Layer w0.7: P5.2 P5.1
  Bottom Layer w1: P5.1 Q9.2
NetP6_1: P6.1 P6.2 Q10.2 | length 7.2
  Bottom Layer w0.7: P6.2 P6.1
  Bottom Layer w1: P6.1 Q10.2
NetP7_1: P7.1 P7.2 Q11.2 | length 7
  Bottom Layer w0.7: P7.2 P7.1
  Bottom Layer w1: P7.1 Q11.2
NetP8_1: P8.1 P8.2 Q12.2 | length 7.6
  Bottom Layer w0.7: P8.2 P8.1
  Bottom Layer w1: P8.1 Q12.2
NetP9_1: P9.1 P9.2 R17.1 | length 6.6
  Bottom Layer w0.7: R17.1@130.683,121.57 134.747,121.57 P9.1@137.287,121.57
NetP10_1: P10.1 P10.2 R18.1 | length 7.2
  Bottom Layer w0.7: R18.1@81.915,121.57 86.614,121.57 P10.1@89.154,121.57
NetP11_1: P11.1 P11.2 R19.1 | length 6.3
  Bottom Layer w0.7: R19.1@115.062,121.57 118.872,121.57 P11.1@121.412,121.57
NetP12_1: P12.1 P12.2 R20.1 | length 7.5
  Bottom Layer w0.7: R20.1@98.552,121.57 103.505,121.57 P12.1@106.045,121.57
NetP13_1: P13.1 P13.2 R21.1 | length 8.3
  Bottom Layer w0.7: R21.1@47.752,120.935 52.959,120.935 P13.2@56.007,121.57
NetP14_1: P14.1 P14.2 R22.1 | length 7.4
  Bottom Layer w0.7: R22.1@65.405,121.57 70.231,121.57 P14.1@72.771,121.57
NetP15_1: P15.1 P15.2 R29.1 | length 7.2
  Bottom Layer w0.7: R29.1@32.766,121.57 37.465,121.57 P15.1@40.005,121.57
NetP16_3: P16.3 R37.2 | length 17.4
  Bottom Layer w0.7: P16.3 40.71,87.63 48.711,95.631 R37.2
NetP18_1: 
NetP19_1: 
NetQ1_3: Q1.3 R1.2 | length 4.1
  Bottom Layer w0.7: Q1.3 R1.2@58.928,39.46
NetQ2_3: Q2.3 R2.2 | length 4.3
  Bottom Layer w0.7: Q2.3 75.946,35.441 75.946,39.333 R2.2
NetQ3_3: Q3.3 R3.2 | length 4.1
  Bottom Layer w0.7: Q3.3@41.402,35.316 R3.2@41.402,39.461
NetQ4_3: Q4.3 R4.2 | length 4.3
  Bottom Layer w0.7: Q4.3 92.71,35.441 92.71,39.333 R4.2
NetQ5_2: Q5.2 R5.2 | length 5.5
  Bottom Layer w0.7: R5.2 52.98,39.497 53.996,40.513 Q5.2
NetQ5_3: Q5.3 R1.1 | length 9.8
  Bottom Layer w0.7: Q5.3 52.089,43.053 58.655,49.62 R1.1@58.928,49.62
NetQ6_2: Q6.2 R6.2 | length 5.5
  Bottom Layer w0.7: R6.2 70.214,39.46 71.268,40.513 Q6.2
NetQ6_3: Q6.3 R2.1 | length 9.7
  Bottom Layer w0.7: Q6.3 69.297,43.053 75.864,49.62 R2.1
NetQ7_2: Q7.2 R7.2 | length 5.3
  Bottom Layer w0.7: R7.2 35.627,39.46 36.68,40.513 Q7.2
NetQ7_3: Q7.3 R3.1 | length 11
  Bottom Layer w0.254: Q7.3 34.644,43.053 35.105,43.514 35.169,43.514
  Bottom Layer w0.7: Q7.3 34.865,43.755 35.41,43.755 R3.1@41.275,49.62
NetQ8_2: Q8.2 R8.2 | length 5.4
  Bottom Layer w0.7: R8.2 87.105,39.46 88.159,40.513 Q8.2
NetQ8_3: Q8.3 R4.1 | length 9.6
  Bottom Layer w0.7: Q8.3 86.125,43.053 92.691,49.62 R4.1
NetQ9_3: Q9.3 R9.2 | length 4.3
  Bottom Layer w0.7: Q9.3 124.333,35.314 124.333,39.206 R9.2
NetQ10_3: Q10.3 R10.2 | length 4.3
  Bottom Layer w0.7: Q10.3 108.839,35.441 108.839,39.333 R10.2
NetQ11_3: Q11.3 R11.2 | length 4.4
  Bottom Layer w0.7: Q11.3 140.081,35.187 140.081,39.243 R11.2
NetQ12_3: Q12.3 R12.2 | length 4.3
  Bottom Layer w0.7: Q12.3 156.591,35.187 156.591,39.079 R12.2
NetQ13_2: Q13.2 R13.2 | length 5.3
  Bottom Layer w0.7: R13.2 118.982,39.333 120.036,40.386 Q13.2
NetQ13_3: Q13.3 R9.1 | length 9.3
  Bottom Layer w0.7: Q13.3 117.875,42.926 124.441,49.493 R9.1
NetQ14_2: Q14.2 R14.2 | length 5.1
  Bottom Layer w0.7: R14.2 102.853,39.46 103.907,40.513 Q14.2
NetQ14_3: Q14.3 R10.1 | length 10
  Bottom Layer w0.7: Q14.3 102.063,43.053 108.63,49.62 R10.1
NetQ15_2: Q15.2 R15.2 | length 4.9
  Bottom Layer w0.7: R15.2 134.514,39.37 135.403,40.259 Q15.2
NetQ15_3: Q15.3 R11.1 | length 9.8
  Bottom Layer w0.7: Q15.3 133.35,42.799 140.081,49.53 R11.1
NetQ16_2: Q16.2 R16.2 | length 5.4
  Bottom Layer w0.7: R16.2 151.151,39.37 152.04,40.259 Q16.2
NetQ16_3: Q16.3 R12.1 | length 9.6
  Bottom Layer w0.7: Q16.3 150.006,42.799 156.572,49.366 R12.1
NetQ17_2: Q17.2 R17.2 | length 6.7
  Bottom Layer w0.7: R17.2 132.032,106.124 134.407,108.499 136.046,108.499 Q17.2
NetQ17_3: Q17.3 R23.2 | length 5.2
  Bottom Layer w0.7: Q17.3@136.271,111.331 Q17.3 138.415,111.013 R23.2
NetQ18_2: Q18.2 R18.2 | length 8.6
  Bottom Layer w0.7: 81.915,105.156 81.915,105.918 82.169,106.172 83.566,106.172 86.371,108.977 Q18.2
NetQ18_3: Q18.3 R24.2 | length 4.9
  Bottom Layer w0.7: Q18.3@88.519,111.585 Q18.3 90.028,111.267 91.821,109.474 ; R24.2@91.821,110.236 R24.2@92.202,109.855
NetQ19_2: Q19.2 R19.2 | length 7
  Bottom Layer w0.7: R19.2 116.538,106.124 119.01,108.596 Q19.2
NetQ19_3: Q19.3 R25.2 | length 4.8
  Bottom Layer w0.7: Q19.3 123.302,110.886 R25.2
NetQ20_2: Q20.2 R20.2 | length 7.8
  Bottom Layer w0.7: R20.2 100.155,106.124 103.02,108.989 Q20.2
NetQ20_3: Q20.3 R26.2 | length 5.1
  Bottom Layer w0.7: Q20.3@105.156,111.556 Q20.3 106.907,111.279 R26.2@109.093,109.093
NetQ21_2: Q21.2 R21.2 | length 7.7
  Bottom Layer w0.7: R21.2 49.99,106.124 52.843,108.977 Q21.2
NetQ21_3: Q21.3 R27.2 | length 5.2
  Bottom Layer w0.7: Q21.3@54.737,111.418 Q21.3 56.754,111.267 R27.2
NetQ22_2: Q22.2 R22.2 | length 7
  Bottom Layer w0.7: R22.2 66.754,106.124 69.353,108.723 Q22.2
NetQ22_3: Q22.3 R28.2 | length 4.8
  Bottom Layer w0.7: Q22.3@71.374,111.331 Q22.3 73.137,111.013 R28.2
NetQ23_2: Q23.2 R29.2 | length 6.7
  Bottom Layer w0.7: R29.2 34.242,106.124 36.747,108.629 38.26,108.629 Q23.2
NetQ23_3: Q23.3 R30.2 | length 5.1
  Bottom Layer w0.7: Q23.3@38.354,111.227 Q23.3 40.498,111.013 R30.2
NetQ24_3: 
NetQ25_3: 
NetQ26_2: 
NetQ26_3: 
NetQ27_3: 
NetR5_1: R5.1 U1.2 | length 33.5
  Bottom Layer w0.7: R5.1 44.45,54.483 44.45,64.897 52.451,72.898 54.014,72.898 55.753,74.637 U1.2
NetR6_1: R6.1 U1.3 | length 51.4
  Bottom Layer w0.7: U1.3 58.202,75.474 58.202,74.331 55.245,71.374 53.086,71.374 45.65,63.938 45.65,55.188 48.133,52.705 65.786,52.705 66.548,51.943 R6.1
NetR7_1: R7.1 U1.1 | length 38.9
  Bottom Layer w0.7: R7.1 38.063,49.62 43.25,54.807 43.25,66.491 52.324,75.565 U1.1
NetR8_1: R8.1 U1.4 | length 68.1
  Bottom Layer w0.7: U1.4 60.833,74.422 56.515,70.104 53.848,70.104 46.85,63.106 46.85,56.147 49.022,53.975 82.423,53.975 83.566,52.832 R8.1
NetR14_1: R14.1 U1.5 | length 83.3
  Bottom Layer w0.7: U1.5 63.373,74.295 62.922,73.844 62.876,73.844 57.739,68.707 54.356,68.707 48.05,62.401 48.05,57.106 49.981,55.175 97.225,55.175 99.568,52.832 R14.1
NetR23_1: R23.1 U1.24 | length 51.5
  Bottom Layer w0.7: U1.24 93.853,93.345 96.012,95.504 114.427,95.504 115.736,96.813 128.69,96.813 130.81,98.933 R23.1 ; R23.1@140.184,98.157 R23.1@140.335,98.308
NetR24_1: R24.1 U1.27 | length 15.6
  Bottom Layer w0.7: U1.27 86.233,98.806 87.694,100.266 R24.1@91.63,100.266 ; R24.1@91.567,100.33 R24.1@91.63,100.266 ; R24.1@92.202,99.695 R24.1@91.63,100.266 ; R24.1@92.329,100.266 R24.1@91.63,100.266
NetR25_1: R25.1 U1.25 | length 38.8
  Bottom Layer w0.7: U1.25 91.313,93.599 94.615,96.901 113.03,96.901 115.062,98.933 R25.1
NetR26_1: R26.1 U1.26 | length 26.4
  Bottom Layer w0.7: U1.26 88.773,94.615 92.456,98.298 98.171,98.298 99.441,99.568 108.458,99.568 R26.1@109.093,98.933
NetR27_1: R27.1 U1.33 | length 16.8
  Bottom Layer w0.7: R27.1 61.722,96.139 67.684,96.139 70.993,92.83 U1.33 U1.33@70.873,90.925
NetR28_1: R28.1 U1.28 | length 15.2
  Bottom Layer w0.7: R28.1 81.026,98.933 82.903,97.056 82.903,91.595 U1.28
NetR30_1: R30.1 U1.34 | length 30.5
  Bottom Layer w0.7: R30.1 55.93,98.933 61.194,93.669 67.494,93.669 68.453,92.71 U1.34
Rst: P20.2 R38.2 U1.9 | length 18.3
  Bottom Layer w0.7: R38.2@63.627,61.722 64.262,61.722 66.04,63.5 P20.2 66.04,67.31 73.533,74.803 U1.9
S6: 
Sck: P20.3 R16.1 U1.8 | length 112.7
  Bottom Layer w0.7: U1.8 70.993,74.803 63.5,67.31 P20.3 63.5,64.72 61.264,62.484 61.264,60.949 63.158,59.055 143.383,59.055 147.32,55.118 R16.1
SCL: IC1.6 R34.1 U1.22 | length 37.3
  Bottom Layer w0.7: U1.22 98.933,86.868 100.33,85.471 109.855,85.471 110.553,86.169 R34.1 110.553,89.471 111.594,90.512 118.403,90.512 119.761,89.154 119.761,84.455 119.126,83.82 IC1.6
SDA: IC1.5 R33.1 U1.23 | length 30.1
  Bottom Layer w0.7: U1.23 96.393,86.868 99.314,83.947 111.506,83.947 113.792,86.233 R33.1 115.666,86.518 117.216,86.518 IC1.5
Sqw: R36.2 U1.29 | length 36.1
  Bottom Layer w0.7: U1.29 81.153,86.106 84.709,82.55 106.426,82.55 107.315,81.661 R36.2
pads on no net: C1.0 C2.0 C3.0 C4.0 C5.0 C6.0 C9.0 C10.0 IC1.0
copper on no net: | length 506.2
  Bottom Layer w0.7: 25.654,25.654 25.654,126.873 177.546,126.873 177.546,25.654 25.654,25.654
  other v1: 28.194,28.071 175.006,28.321 28.448,124.079 175.387,124.804

## Polygon pours and split planes (outlines as drawn)
GND on Bottom Layer "Bottom Layer-GND" (solid, remove dead copper, pour order 0): 26.289,126.238 170.561,126.238 176.911,119.888 176.911,26.416 26.543,26.416

## Other copper
Bottom Layer:
  rectangle net NetBT1_1: 136.652,67.818 143.256,75.565
  rectangle net GND: 157.48,68.199 163.068,73.787
  rectangle net GND: 150.368,119.761 155.448,124.333
  rectangle net +12V: 157.48,119.761 162.56,124.333
  rectangle net NetP8_1: 146.812,30.98 153.416,34.663
  rectangle net NetP7_1: 130.81,31.115 137.414,34.798
  rectangle net NetP5_1: 114.935,31.107 121.539,34.79
  rectangle net NetP6_1: 99.441,31.234 106.045,34.917
  rectangle net NetP4_1: 83.185,31.369 89.789,35.052
  rectangle net NetP2_1: 65.913,31.496 73.152,35.052
  rectangle net NetP1_1: 48.133,31.496 55.372,35.052
  rectangle net NetP3_1: 30.099,30.988 37.338,34.544
  rectangle net NetQ17_2: 129.413,104.775 131.826,107.442
  rectangle net NetQ19_2: 113.792,104.775 116.205,107.442
  rectangle net NetQ20_2: 97.282,104.775 99.695,107.442
  rectangle net NetQ18_2: 80.645,104.775 83.058,107.442
  rectangle net NetP9_1: 129.286,119.126 140.081,122.682
  rectangle net NetP11_1: 113.665,119.126 124.206,122.555
  rectangle net NetP12_1: 97.155,119.126 107.823,122.682
  rectangle net NetP10_1: 80.518,119.126 91.313,122.555
  rectangle net NetP15_1: 31.496,119.253 41.656,122.809
  rectangle net NetP13_1: 46.863,119.126 57.658,122.682
  rectangle net NetQ22_2: 64.135,104.775 66.548,107.442
  rectangle net NetP14_1: 64.008,119.253 74.803,122.682
  rectangle net NetQ21_2: 46.99,104.775 49.403,107.442
  rectangle net NetQ23_2: 31.623,104.775 34.036,107.442
  pour cut-out: 28.944,36.703 28.944,28.071 159.867,28.067 159.893,28.093 159.893,36.703
  pour cut-out: 30.407,126.238 30.407,118.965 31.136,118.237 142.748,118.237 142.748,126.238
  pour cut-out: 111.633,125.857 126.746,125.857 126.746,118.409 126.32,117.983 111.633,117.983
  pour cut-out: 127.127,126.111 142.24,126.111 142.24,118.663 141.814,118.237 127.127,118.237
  text "SkyLimit Electronics" at 167.767,82.423 h2 r90
  text "Khio Tech" at 170.053,82.423 h2 r90

## Silkscreen, mask and mechanical layers (free items; w line width, h text height)
Top Overlay:
  the board outline again, w0.7

## Text inside footprints (layer, text, board x,y; h text height)
U2: Top Overlay "1" at 158.619,100.152 h1.5 r180; Top Overlay "2" at 155.059,100.152 h1.5 r180; Top Overlay "3" at 151.249,100.152 h1.5 r180